# Altium PCB SerreVo_multiplexeur_PCB ASCII REV 1.00.PcbDoc
Units mm, origin at the board's own origin, x right, y up, seen from the top; angles counter-clockwise.
Board outline 69.85 x 45.09 mm, 2 copper layers (Top, Bottom), stack 1.54 mm thick; 28 components, 25 nets, 146 pads, 45 vias.
Unrouted connection lines stored in the file: 10.
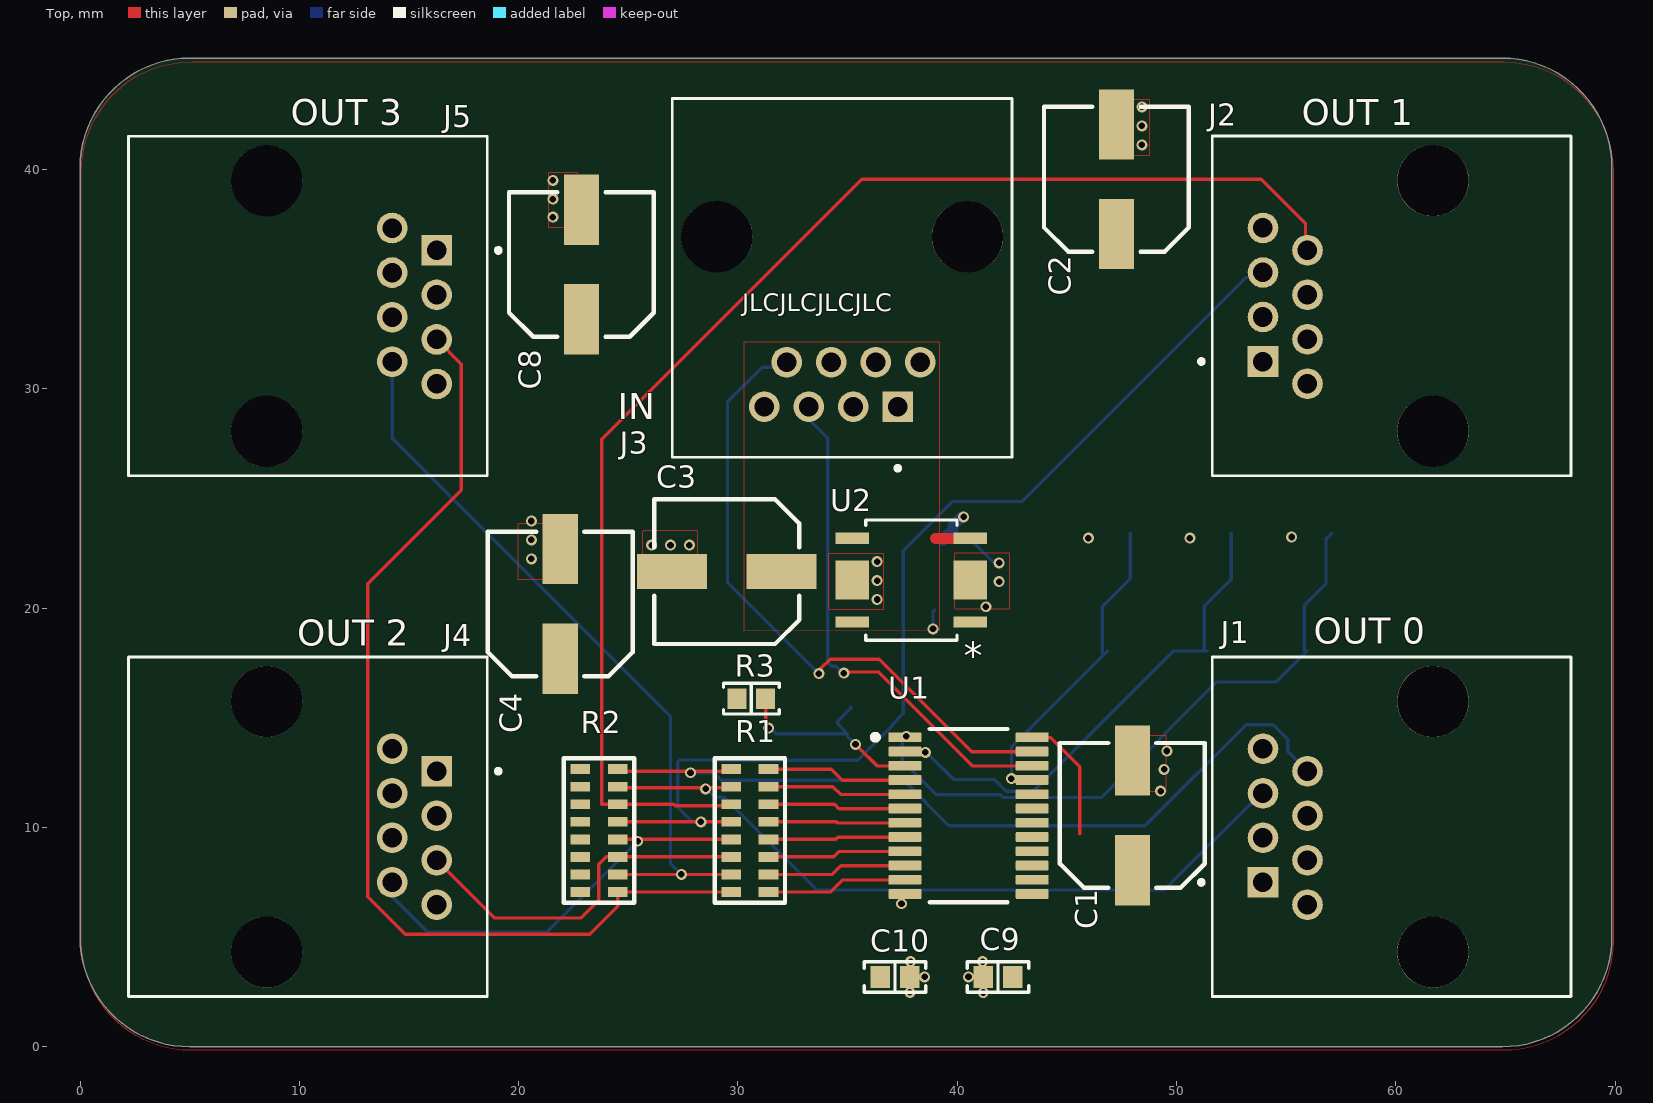
[diagram p0: Top view]
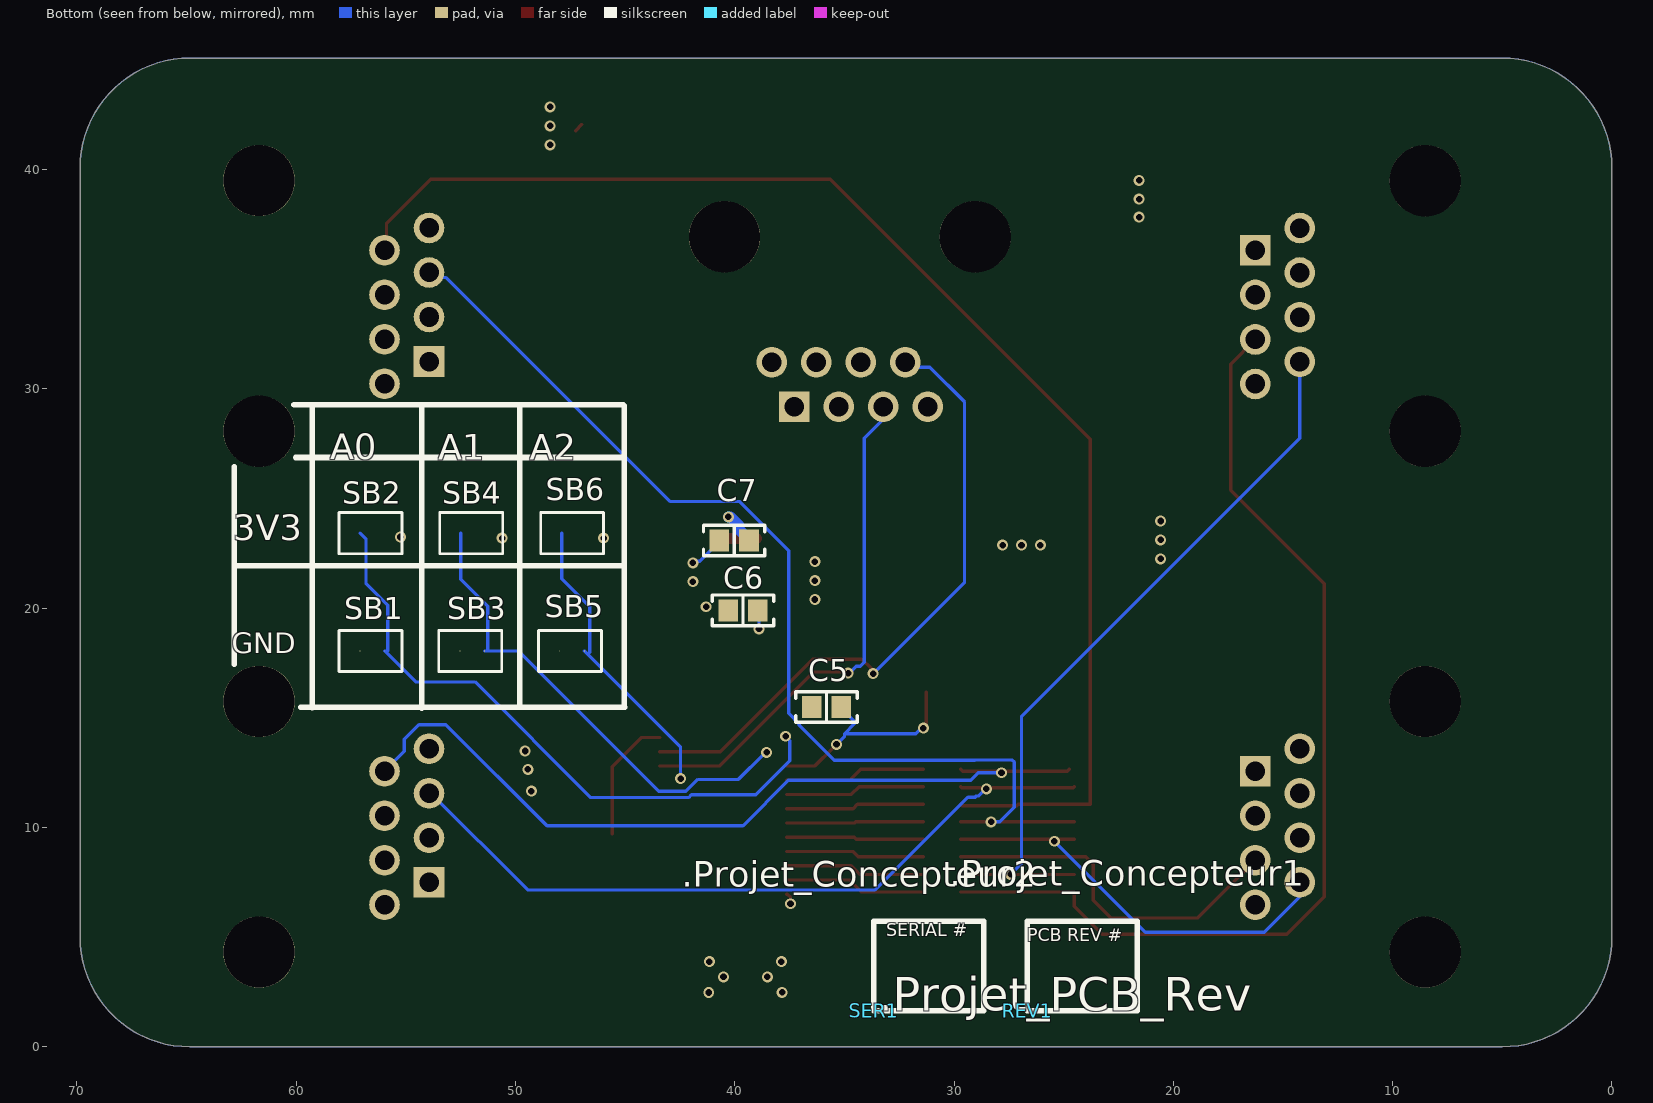
[diagram p1: Bottom view, seen from below]

## Layer stack, top to bottom
Top Solder: solder mask 0.0102, Solder Resist, Dk 3.5
Top: signal copper 0.035
Dielectric 1: core 1.47, FR-4, Dk 4.6
Bottom: signal copper 0.035
Bottom Solder: solder mask 0.0102, Solder Resist, Dk 3.5

## Board outline
0,5 0,40.085 cw(c5,40.085) 5,45.085 64.85,45.085 cw(c64.85,40.085) 69.85,40.085 69.85,5 cw(c64.85,5) 64.85,0 5,0 cw(c5,5)

## Design rules (kind name [scope] priority, off if disabled: settings)
AssemblyTestPointUsage [All] p0: scope1count=1 scope1_0_kind=Board scope1_0_value=Board scope2count=1 scope2_0_kind=Board scope2_0_value=Board commentlength=0
AssemblyTestpoint [All] p0: scope1count=1 scope1_0_kind=Board scope1_0_value=Board scope2count=1 scope2_0_kind=Board scope2_0_value=Board commentlength=0
BoardOutlineClearance [All] p0: scope1count=1 scope1_0_kind=Board scope1_0_value=Board scope2count=1 scope2_0_kind=Board scope2_0_value=Board commentlength=0 gap=0.2
BoardOutlineClearance [All] p1: gap=0.2 ignorepadtopadclearanceinfootprint=FALSE except(0: Arc-SplitContinuation Track-SplitContinuation SMDPad-SplitContinuation THPad-SplitContinuation Via-SplitContinuation Fill-SplitContinuation Poly-SplitContinuation Region-SplitContinuation Text-SplitContinuation)
Clearance [All] p0: scope1count=1 scope1_0_kind=Board scope1_0_value=Board scope2count=1 scope2_0_kind=Board scope2_0_value=Board commentlength=0 gap=0.152
Clearance [All] p1: gap=0.152 ignorepadtopadclearanceinfootprint=FALSE except(0: Arc-Hole Track-Hole SMDPad-Hole THPad-Hole Via-Hole Fill-Hole Poly-Hole Region-Hole Text-Hole; 0.127: Arc-Arc Arc-Track Track-Track SMDPad-Fill SMDPad-Poly SMDPad-Region; 0.2: Arc-SMDPad Track-SMDPad; 0.254: Arc-Via Track-Via Via-Via; 0.33: Arc-THPad Track-THPad; 0.5: THPad-THPad)
ComponentClearance [All] p0: scope1count=1 scope1_0_kind=Board scope1_0_value=Board scope2count=1 scope2_0_kind=Board scope2_0_value=Board commentlength=0 gap=0.102 collisioncheckmode=3
ComponentClearance "Schematic Component Clearance Constraint" [All] p0: scope1count=1 scope1_0_kind=Component scope1_0_value=REV1 scope2count=1 scope2_0_kind=Board scope2_0_value=Board commentlength=0 gap=0 collisioncheckmode=3
ComponentClearance "Schematic Component Clearance Constraint_1" [All] p0: scope1count=1 scope1_0_kind=Component scope1_0_value=SER1 scope2count=1 scope2_0_kind=Board scope2_0_value=Board commentlength=0 gap=0 collisioncheckmode=3
ComponentClearance "Schematic Component Clearance Constraint_1" [InComponent('SER1')] p1: gap=0 collisioncheckmode=3 verticalgap=0 showdistances=FALSE
ComponentClearance "Schematic Component Clearance Constraint" [InComponent('REV1')] p2: gap=0 collisioncheckmode=3 verticalgap=0 showdistances=FALSE
ComponentClearance [All] p3: gap=0.102 collisioncheckmode=3 verticalgap=0.102 showdistances=FALSE
DiffPairsRouting [All] p0: scope1count=1 scope1_0_kind=Board scope1_0_value=Board scope2count=1 scope2_0_kind=Board scope2_0_value=Board commentlength=0
FabricationTestPointUsage [All] p0: scope1count=1 scope1_0_kind=Board scope1_0_value=Board scope2count=1 scope2_0_kind=Board scope2_0_value=Board commentlength=0 valid=0 allowmultiple=FALSE
FabricationTestpoint [All] p0: scope1count=1 scope1_0_kind=Board scope1_0_value=Board scope2count=1 scope2_0_kind=Board scope2_0_value=Board commentlength=0 side=3 testpointundercomponent=TRUE minsize=1.016 maxsize=2.54 preferedsize=1.524 minholesize=0 maxholesize=1.016 preferedholesize=0.813 testpointgrid=0.025
FanoutControl Fanout_Default [All] p0: scope1count=1 scope1_0_kind=Board scope1_0_value=Board scope2count=1 scope2_0_kind=Board scope2_0_value=Board commentlength=30 // Fanout_Default (Default Rule)
FanoutControl Fanout_Small [All] p0 off: scope1count=1 scope1_0_kind=Board scope1_0_value=Board scope2count=1 scope2_0_kind=Board scope2_0_value=Board commentlength=84 // Protel DXP Scope 1 Expression Was: (CompPinCount < 5)   Fanout_Small (Default Rule)
FanoutControl Fanout_SOIC [All] p0 off: scope1count=1 scope1_0_kind=Board scope1_0_value=Board scope2count=1 scope2_0_kind=Board scope2_0_value=Board commentlength=71 // Protel DXP Scope 1 Expression Was: IsSOIC   Fanout_SOIC (Default Rule)
FanoutControl Fanout_LCC [All] p0 off: scope1count=1 scope1_0_kind=Board scope1_0_value=Board scope2count=1 scope2_0_kind=Board scope2_0_value=Board commentlength=69 // Protel DXP Scope 1 Expression Was: IsLCC   Fanout_LCC (Default Rule)
FanoutControl Fanout_BGA [All] p0 off: scope1count=1 scope1_0_kind=Board scope1_0_value=Board scope2count=1 scope2_0_kind=Board scope2_0_value=Board commentlength=69 // Protel DXP Scope 1 Expression Was: IsBGA   Fanout_BGA (Default Rule)
Height [All] p0: scope1count=1 scope1_0_kind=Board scope1_0_value=Board scope2count=1 scope2_0_kind=Board scope2_0_value=Board commentlength=0
HoleSize [All] p0: scope1count=1 scope1_0_kind=Board scope1_0_value=Board scope2count=1 scope2_0_kind=Board scope2_0_value=Board commentlength=0 absolutevalues=TRUE maxlimit=6.3 minlimit=0.3 maxpercent=80.000 minpercent=20.000
HoleSize [All] p1: absolutevalues=TRUE maxlimit=6.3 minlimit=0.3 maxpercent=80.000 minpercent=20.000
HoleToHoleClearance [All] p0: scope1count=1 scope1_0_kind=Board scope1_0_value=Board scope2count=1 scope2_0_kind=Board scope2_0_value=Board commentlength=0
HoleToHoleClearance [All] p1: gap=0.5 allowstackedmicrovias=FALSE
LayerPairs [All] p0: scope1count=1 scope1_0_kind=Board scope1_0_value=Board scope2count=1 scope2_0_kind=Board scope2_0_value=Board commentlength=0 enforce=TRUE
MinimumAnnularRing [All] p0: scope1count=1 scope1_0_kind=Board scope1_0_value=Board scope2count=1 scope2_0_kind=Board scope2_0_value=Board commentlength=0 minimumring=0.1
MinimumAnnularRing [All] p1: minimumring=0.1
MinimumSolderMaskSliver [All] p0: scope1count=1 scope1_0_kind=Board scope1_0_value=Board scope2count=1 scope2_0_kind=Board scope2_0_value=Board commentlength=0
MinimumSolderMaskSliver [All] p1: minsoldermaskwidth=0.1
NetAntennae [All] p0: scope1count=1 scope1_0_kind=Board scope1_0_value=Board scope2count=1 scope2_0_kind=Board scope2_0_value=Board commentlength=0
PasteMaskExpansion [All] p0: scope1count=1 scope1_0_kind=Board scope1_0_value=Board scope2count=1 scope2_0_kind=Board scope2_0_value=Board commentlength=0 expansion=0
PlaneClearance [All] p0: scope1count=1 scope1_0_kind=Board scope1_0_value=Board scope2count=1 scope2_0_kind=Board scope2_0_value=Board commentlength=0 clearance=0.152
PlaneClearance [All] p1: clearance=0.152
PlaneConnect [All] p0: scope1count=1 scope1_0_kind=Board scope1_0_value=Board scope2count=1 scope2_0_kind=Board scope2_0_value=Board commentlength=0 planeconnectstyle=Relief reliefexpansion=0.508 reliefentries=4 reliefconductorwidth=0.254 reliefairgap=0.254
PlaneConnect [All] p1: pad.planeconnectstyle=Relief pad.reliefexpansion=0.508 pad.reliefentries=4 pad.reliefconductorwidth=0.254 pad.reliefairgap=0.254 via.planeconnectstyle=Direct via.reliefexpansion=0.508 via.reliefentries=4 via.reliefconductorwidth=0.254 via.reliefairgap=0.254
PolygonConnect [All] p0: scope1count=1 scope1_0_kind=Board scope1_0_value=Board scope2count=1 scope2_0_kind=Board scope2_0_value=Board commentlength=0 connectstyle=Relief reliefconductorwidth=0.254 reliefentries=4 polygonreliefangle="90 Angle"
PolygonConnect [All] p1: thpad.connectstyle=Relief thpad.reliefconductorwidth=0.254 thpad.reliefentries=4 thpad.polygonreliefangle="90 Angle" thpad.airgapwidth=0.254 smdpad.connectstyle=Direct smdpad.reliefconductorwidth=0.254 smdpad.reliefentries=4 smdpad.polygonreliefangle="90 Angle" smdpad.airgapwidth=0.254 via.connectstyle=Direct via.reliefconductorwidth=0.254 via.reliefentries=4 via.polygonreliefangle="90 Angle" via.airgapwidth=0.254
RoutingCorners [All] p0: scope1count=1 scope1_0_kind=Board scope1_0_value=Board scope2count=1 scope2_0_kind=Board scope2_0_value=Board commentlength=0 cornerstyle=45-Degree minsetback=2.54 maxsetback=2.54
RoutingLayers [All] p0: scope1count=1 scope1_0_kind=Board scope1_0_value=Board scope2count=1 scope2_0_kind=Board scope2_0_value=Board commentlength=0 top layer=Automatic bottom layer=Automatic
RoutingPriority [All] p0: scope1count=1 scope1_0_kind=Board scope1_0_value=Board scope2count=1 scope2_0_kind=Board scope2_0_value=Board commentlength=0
RoutingTopology [All] p0: scope1count=1 scope1_0_kind=Board scope1_0_value=Board scope2count=1 scope2_0_kind=Board scope2_0_value=Board commentlength=0 topology=Shortest
RoutingVias [All] p0: scope1count=1 scope1_0_kind=Board scope1_0_value=Board scope2count=1 scope2_0_kind=Board scope2_0_value=Board commentlength=0 holewidth=0.3 width=0.5 viastyle="Through Hole" minholewidth=0.3 minwidth=0.5 maxholewidth=6.3 maxwidth=6.5
RoutingVias [All] p1: holewidth=0.3 width=0.5 viastyle="Through Hole" minholewidth=0.3 minwidth=0.5 maxholewidth=6.3 maxwidth=6.5
ShortCircuit [All] p0: scope1count=1 scope1_0_kind=Board scope1_0_value=Board scope2count=1 scope2_0_kind=Board scope2_0_value=Board commentlength=0 allowed=FALSE
SilkToBoardRegionClearance [All] p0: scope1count=1 scope1_0_kind=Board scope1_0_value=Board scope2count=1 scope2_0_kind=Board scope2_0_value=Board commentlength=0
SilkToSilkClearance [All] p0: scope1count=1 scope1_0_kind=Board scope1_0_value=Board scope2count=1 scope2_0_kind=Board scope2_0_value=Board commentlength=0
SilkToSilkClearance [All] p1: silktosilkclearance=0.102
SilkToSolderMaskClearance [All] p0 off: scope1count=1 scope1_0_kind=Board scope1_0_value=Board scope2count=1 scope2_0_kind=Board scope2_0_value=Board commentlength=44 // Protel DXP Scope 1 Expression Was: IsPad
SilkToSolderMaskClearance [IsPad] p1: minsilkscreentomaskgap=0.024 clearancetoexposedcopper=FALSE
SolderMaskExpansion [All] p0: scope1count=1 scope1_0_kind=Board scope1_0_value=Board scope2count=1 scope2_0_kind=Board scope2_0_value=Board commentlength=0 expansion=0.051
SolderMaskExpansion SolderMaskExpansion_Via [All] p0 off: scope1count=1 scope1_0_kind=Board scope1_0_value=Board scope2count=1 scope2_0_kind=Board scope2_0_value=Board commentlength=44 expansion=0.102 // Protel DXP Scope 1 Expression Was: isVia
SolderMaskExpansion SolderMaskExpansion_Via [isVia] p1: expansion=0.102 istentingtop=TRUE
SolderMaskExpansion [All] p2: expansion=0.051 istentingtop=FALSE
UnRoutedNet [All] p0: scope1count=1 scope1_0_kind=Board scope1_0_value=Board scope2count=1 scope2_0_kind=Board scope2_0_value=Board commentlength=0
UnpouredPolygon [All] p0: scope1count=1 scope1_0_kind=Board scope1_0_value=Board scope2count=1 scope2_0_kind=Board scope2_0_value=Board commentlength=0
Width [All] p0: scope1count=1 scope1_0_kind=Board scope1_0_value=Board scope2count=1 scope2_0_kind=Board scope2_0_value=Board commentlength=0 maxlimit=25.4 minlimit=0.127 preferedwidth=0.152
Width [All] p1: maxlimit=25.4 minlimit=0.127 preferedwidth=0.152 minimp=50.000000 maximp=50.000000 favimp=50.000000
22 further rules are at their usual default settings.

## Classes and differential pairs
component class TEMPLATE_Circuit: C1 C2 C3 C4 C5 C6 C7 C8 C9 C10 J1 J2 J3 J4 J5 R1 R2 R3 SB1 SB3 SB4 SB5 SB6 U1 U2
component class TEMPLATE_Title: REV1 SER1

## Components (designator, comment, footprint, x,y, rotation, side; value= is the part's Value field where it differs from the comment)
C1 "47 µF" "CAP ALSMD 6.6MM H6.1MM" 47.981,10.552 r90 top
C2 "47 µF" "CAP ALSMD 6.6MM H6.1MM" 47.256,39.561 r90 top
C3 "47 µF" "CAP ALSMD 6.6MM H6.1MM" 29.489,21.666 r180 top
C4 "47 µF" "CAP ALSMD 6.6MM H6.1MM" 21.895,20.193 r90 top
C5 "1 µF" "CAP 0603_1608" 35.814,15.494 r180 bottom
C6 "4.7 µF" "CAP 0603_1608" 39.619,19.902 r180 bottom
C7 "4.7 µF" "CAP 0603_1608" 40.025,23.089 r180 bottom
C8 "47 µF" "CAP ALSMD 6.6MM H6.1MM" 22.86,35.674 r90 top
C9 "22µF" "CAP 0603_1608" 41.859,3.185 r0 top
C10 "0.1 µF" "CAP 0603_1608" 37.159,3.185 r180 top
J1 "SS-60000-007" BEL_SS-60000-007 55.969,10.033 r90 top
J2 "SS-60000-007" BEL_SS-60000-007 55.969,33.785 r90 top
J3 "SS-60000-007" BEL_SS-60000-007 34.751,31.221 r180 top
J4 "SS-60000-007" BEL_SS-60000-007 14.229,10.033 r270 top
J5 "SS-60000-007" BEL_SS-60000-007 14.229,33.781 r270 top
R1 "742C163330JP" "RESNET 2506-16 CONCAVE" 30.546,9.86 r0 top
R2 "742C163331JP" "RESNET 2506-16 CONCAVE" 23.661,9.86 r0 top
R3 "10 kOhms" "RES 0603_1608" 30.607,15.875 r180 top
REV1 "Revision Cartridge Mini" REV_REVISION_CARTRIDGE_MINI 26.651,1.651 r180 bottom
SB1 "SBR_NO_0603" 0603_solderBridge_NO 56.523,18.05 r180 bottom
SB2 "SBR_NO_0603" 0603_solderBridge_NO 56.523,23.419 r180 bottom
SB3 "SBR_NO_0603" 0603_solderBridge_NO 51.97,18.05 r180 bottom
SB4 "SBR_NO_0603" 0603_solderBridge_NO 51.923,23.419 r180 bottom
SB5 "SBR_NO_0603" 0603_solderBridge_NO 47.418,18.05 r180 bottom
SB6 "SBR_NO_0603" 0603_solderBridge_NO 47.324,23.419 r180 bottom
SER1 "Serial Cartridge MICRO" SER_SERIAL_CARTRIDGE_MICRO 33.65,1.651 r180 bottom
U1 "TCA9548APWR" FP-PW0024A-MFG 40.513,10.541 r0 top
U2 "S-1172B33-E6T1U" HSOP-6_FH006-A-P-SD-2.1_ABL 37.901,21.277 r180 top

## Footprints (in the part's own frame and the unit in brackets; to place one, negate y for a bottom-side part, rotate by r counter-clockwise, add the part's x,y. Pads: shape width x height; smd on the part's side, far side on the other; paste and mask are expansions set on the pad)
0603_solderBridge_NO [mil]
  round 1 smd paste-0.5 mask+2: " "(-22.15,0) " "(22.15,0)
  silkscreen extent -60,-37 53,37
BEL_SS-60000-007 [mm]
  rect 1.398x1.398 hole 0.89: 1(-2.535,2.03)
  round 1.398 hole 0.89: 2(-3.555,0) 3(-1.525,0) 4(0.505,0) 5(-0.505,2.03) 6(1.525,2.03) 7(3.555,2.03) 8(2.535,0)
  round 3.25 hole 3.25 unplated: ""(-5.715,-5.72) ""(5.715,-5.72)
  silkscreen extent -7.75,-12.02 7.75,4.94
"CAP 0603_1608" [mm] "Chip Capacitor, 2-Leads, Body 1.60x0.80mm, IPC Medium Density"
  rect 0.9x1 smd: 1(-0.675,0) 2(0.675,0)
  silkscreen extent -1.4,-0.7 1.4,0.7
"CAP ALSMD 6.6MM H6.1MM" [mm] "Aluminum Electrolytic Capacitor, Body 6.60x6.60x6.10mm, IPC Low Density"
  rect 3.2x1.6 smd: 1(-2.5,0) 2(2.5,0)
  silkscreen extent -3.3,-3.3 3.3,3.3
FP-PW0024A-MFG [mm]
  rrect22% 1.5x0.45 smd paste+0 mask+0: 1(-2.9,3.575) 2(-2.9,2.925) 3(-2.9,2.275) 4(-2.9,1.625) 5(-2.9,0.975) 6(-2.9,0.325) 7(-2.9,-0.325) 8(-2.9,-0.975) 9(-2.9,-1.625) 10(-2.9,-2.275) 11(-2.9,-2.925) 12(-2.9,-3.575) 13(2.9,-3.575) 14(2.9,-2.925) 15(2.9,-2.275) 16(2.9,-1.625) 17(2.9,-0.975) 18(2.9,-0.325) 19(2.9,0.325) 20(2.9,0.975) 21(2.9,1.625) 22(2.9,2.275) 23(2.9,2.925) 24(2.9,3.575)
  silkscreen extent -4.37,-3.95 1.77,3.95
HSOP-6_FH006-A-P-SD-2.1_ABL [mil]
  rect 60x20 smd paste+0 mask+0: 1(-106,75.2) 3(-106,-75.2) 4(106,-75.2) 6(106,75.2)
  rect 60x70 smd paste+0 mask+0: 2(-106,0) 5(106,0)
  silkscreen extent -82,-108 82,108
"RES 0603_1608" [mm] "Chip Resistor, 2-Leads, Body 1.60x0.80mm, IPC Medium Density"
  rect 0.85x0.95 smd: 1(-0.65,0) 2(0.65,0)
  silkscreen extent -1.27,-0.7 1.27,0.7
"RESNET 2506-16 CONCAVE" [mm] "8 resistor 6.40x1.60mm, 0.7mm high"
  rect 0.9x0.45 smd: 1(-0.85,2.8) 2(-0.85,2) 3(-0.85,1.2) 4(-0.85,0.4) 5(-0.85,-0.4) 6(-0.85,-1.2) 7(-0.85,-2) 8(-0.85,-2.8) 9(0.85,-2.8) 10(0.85,-2) 11(0.85,-1.2) 12(0.85,-0.4) 13(0.85,0.4) 14(0.85,1.2) 15(0.85,2) 16(0.85,2.8)
  silkscreen extent -1.6,-3.3 1.6,3.3
REV_REVISION_CARTRIDGE_MINI [mm]
  silkscreen extent 0,0 5,4.08
SER_SERIAL_CARTRIDGE_MICRO [mm]
  silkscreen extent 0,0 5,4.08

## Part data
C1 C2 C3 C4 C8: library part 476SML035M, "CAP ALUM 47UF 20% 35V SMD"
C5: library part C0603X105M4RACAUTO, "CAP CER 1UF 16V X7R 0603"
C6 C7: library part CL10A475KA8NQNC, "CAP CER 4.7UF 25V X5R 0603"
C9: library part 06036D226MAT2A, "CAP CER 22UF 6.3V X5R 0603"
C10: library part C0603C104M4RAC7411, "CAP CER 0.1UF 16V X7R 0603"
J1 J2 J3 J4 J5: "Jack Modular Connector 8p8c _RJ45, Ethernet_ Vertical Unshielded Cat6"
R1: "RES ARRAY 8 RES 33 OHM 2506"
R2: "RES ARRAY 8 RES 330 OHM 2506"
R3: library part RCS060310K0JNEA, "RES SMD 10K OHM 5% 1/4W 0603"
REV1: library part REV_REVISION_CARTRIDGE_MINI, "REV - REVISION CARTRIDGE MINI"
SB1 SB2 SB3 SB4 SB5 SB6: library part CMP-005-000007-1, "Solder Bridge 0603 NO"
SER1: library part SER_SERIAL_CARTRIDGE_MICRO, "SER - SERIAL CARTRIDGE MICRO"
U1: library part CMP-04892-000002-1, "IC I2C SW 8CH W/RESET 24TSSOP"
U2: "No Description Available"

## Via types
v1: diameter 0.5, hole 0.3, Top to Bottom, tented both sides, 45 vias

## Nets (pads, with @x,y where several pads share a name; then routed paths per layer and width w, separated by ;. In a path a pad name is that pad's centre, name@x,y a point inside that pad or via, vN(x,y) a via of type N, cw(c..) or ccw(c..) an arc to the next point about the centre after c; other vN are vias at no path point)
3V3: "SB2. "@55.96,23.419 "SB4. "@51.361,23.419 "SB6. "@46.761,23.419 C1.1 C2.1 C4.1 C7.2 C8.1 C9.2 C10.2 J1.3 J1.4 J2.3 J2.4 J4.3 J4.4 J5.3 J5.4 R2.1 R2.2 R2.3 R2.4 R2.5 R2.6 R2.7 R2.8 R3.2 U1.24 U2.1 | length 7.3
  Top w0.152: U1.24@43.425,14.108 44.233,14.108 45.577,12.764 45.577,9.716
  Bottom w0.5: C7.2 39.35,23.139 39.8,23.589 39.8,23.775 40.187,24.162 v1(40.289,24.162)
  other v1: 45.979,23.197 50.602,23.197 55.25,23.248
5V: C3.1 C6.2 J3.1 J3.2 U2.3 U2.6 | length 2.5
  Top w0.5: 39.002,23.187 U2.3
  Bottom w0.152: v1(38.891,19.055) 38.891,19.849 C6.2
A0: "SB1. "@55.96,18.05 "SB2. "@57.085,23.419 U1.1 | length 28.8
  Bottom w0.152: 37.49,13.969 37.49,13.041 39.031,11.501 41.974,11.501 42.106,11.368 46.572,11.368 51.841,16.637 54.548,16.637 55.96,18.05 55.829,18.05 ; 55.829,18.11 55.829,20.136 56.812,21.119 56.812,23.145 57.085,23.419
  other v1: 37.676,14.161
A1: "SB3. "@51.408,18.05 "SB4. "@52.486,23.419 U1.2 | length 22
  Bottom w0.152: v1@38.684,13.335 39.827,12.192 41.677,12.192 42.222,11.647 43.469,11.647 49.871,18.05 51.257,18.05 ; 51.408,18.05 51.257,18.05 ; 52.486,23.419 52.486,21.328 51.257,20.099 51.257,18.05
  other v1: 38.54,13.424
A2: "SB5. "@46.856,18.05 "SB6. "@47.886,23.419 U1.21 | length 13.6
  Bottom w0.152: v1(42.462,12.227) 42.469,12.234 42.469,13.663 46.856,18.05 ; 46.609,17.983 46.609,20.062 47.886,21.34 47.886,23.419
GND: "SB1. "@57.085,18.05 "SB3. "@52.533,18.05 "SB5. "@47.981,18.05 C1.2 C2.2 C3.2 C4.2 C5.1 C6.1 C7.1 C8.2 C9.1 C10.1 J1.5 J1.7 J2.5 J2.7 J3.5 J3.7 J4.5 J4.7 J5.5 J5.7 U1.12 U2.2 U2.5 | length 2.7
  Top w0.152: v1(37.455,6.524) 37.455,6.809 37.604,6.958 U1.12@37.625,6.958 ; v1@41.859,22.022 v1(41.909,22.072) ; C2.2@46.971,42.061 C2.2@47.256,41.776
  Bottom w0.152: C7.1 40.7,23.039 41.6,22.138 41.843,22.138 v1(41.909,22.072)
  other v1: 37.839,2.485 41.184,2.478 38.509,3.185 40.509,3.185 37.875,3.885 41.157,3.885 49.276,11.659 49.428,12.649 49.555,13.487 41.3,20.066 36.348,20.396 41.909,21.209 36.348,21.26 36.348,22.123 20.574,22.251 26.058,22.88 26.921,22.88 27.784,22.88 20.574,23.114 20.574,23.978 21.56,37.836 21.56,38.654 21.56,39.51 48.414,41.132 48.414,41.996 48.414,42.859
NetC5_2: C5.2 R3.1 U1.3 | length 10.1
  Top w0.152: R3.1@31.267,16.176 31.267,14.75 31.394,14.623 v1(31.394,14.529) ; v1@35.504,13.642 36.339,12.808 U1.3@37.625,12.808
  Bottom w0.152: v1(31.394,14.529) 31.488,14.529 31.738,14.279 34.993,14.279 ; C5.2 35.139,15.444 34.55,14.855 34.55,14.722 34.993,14.279 ; v1(35.357,13.792) 34.993,14.156 34.993,14.279
NetR1_9: R1.9 U1.11 | length 6.5
  Top w0.152: R1.9 34.223,7.06 34.77,7.608 U1.11@37.625,7.608
NetR1_10: R1.10 U1.10 | length 6.4
  Top w0.152: R1.10 34.299,7.86 34.697,8.258 U1.10@37.625,8.258
NetR1_11: R1.11 U1.9 | length 6.3
  Top w0.152: R1.11 34.376,8.66 34.623,8.908 U1.9@37.625,8.908
NetR1_12: R1.12 U1.8 | length 6.3
  Top w0.152: R1.12 34.452,9.46 34.549,9.558 U1.8@37.625,9.558
NetR1_13: R1.13 U1.7 | length 6.3
  Top w0.152: R1.13 34.477,10.26 34.53,10.208 U1.7@37.625,10.208
NetR1_14: R1.14 U1.6 | length 6.3
  Top w0.152: R1.14 34.401,11.06 34.604,10.858 U1.6@37.625,10.858
NetR1_15: R1.15 U1.5 | length 6.4
  Top w0.152: R1.15 34.325,11.86 34.678,11.508 U1.5@37.625,11.508
NetR1_16: R1.16 U1.4 | length 6.4
  Top w0.152: R1.16 34.249,12.66 34.751,12.158 U1.4@37.625,12.158
SCL_0: J1.6 R1.2 R2.15 | length 34.3
  Top w0.152: R2.15 24.561,11.81 28.474,11.81 v1(28.524,11.76) 28.574,11.81 29.646,11.81 R1.2
  Bottom w0.152: v1(28.524,11.76) 28.555,11.76 28.878,11.437 28.986,11.437 29.037,11.386 29.363,11.386 33.599,7.151 49.443,7.151 J1.6@53.85,11.558
SCL_1: J2.6 R1.4 R2.13 | length 48.9
  Top w0.152: R2.13 v1(28.305,10.26) R1.4
  Bottom w0.152: v1(28.305,10.26) 27.916,10.26 27.254,10.922 27.254,12.988 27.343,13.077 29.037,13.077 29.046,13.068 35.453,13.068 37.053,14.668 37.053,14.718 37.541,15.206 37.541,22.62 39.787,24.867 40.406,24.867 ; 40.434,24.867 42.951,24.867 53.163,35.079 53.708,35.079 J2.6
SCL_2: J4.6 R1.6 R2.11 | length 16.6
  Top w0.152: J4.6 18.891,5.876 22.844,5.876 23.657,6.689 23.657,8.319 23.998,8.66 R2.11 R1.6
SCL_3: J5.6 R1.8 R2.9 | length 46.1
  Top w0.152: J5.6 17.383,31.132 17.383,25.388 13.116,21.121 13.116,6.846 14.822,5.14 23.246,5.14 24.52,6.414 R2.9@24.52,7.06 ; R2.9 R2.9@24.52,7.06 ; R1.8 R2.9@24.52,7.06
SCL_IN: J3.6 U1.22 | length 23.3
  Top w0.152: v1(34.823,17.043) 34.873,17.093 36.399,17.093 40.684,12.808 U1.22@43.425,12.808
  Bottom w0.152: J3.6@32.892,28.953 34.089,27.756 34.089,17.53 34.269,17.351 34.454,17.351 34.761,17.043 v1(34.823,17.043)
SDA_0: J1.8 R1.1 R2.16 | length 37.4
  Top w0.152: R2.16@24.747,12.649 24.833,12.563 27.799,12.563 v1@27.834,12.598 ; v1(27.834,12.497) v1@27.834,12.598 ; R1.1 29.599,12.563 27.869,12.563 v1@27.834,12.598
  Bottom w0.152: v1(27.834,12.497) 28.888,12.497 29.236,12.148 37.557,12.148 39.621,10.084 48.56,10.084 53.169,14.693 54.397,14.693 55.064,14.026 55.064,13.473 J1.8
SDA_1: J2.8 R1.3 R2.14 | length 61.7
  Top w0.152: R1.3 29.623,10.987 27.14,10.987 27.067,11.06 23.784,11.06 23.784,27.699 35.646,39.561 53.857,39.561 55.88,37.538 J2.8@55.88,36.316
SDA_2: J4.8 R1.5 R2.12 | length 19.5
  Top w0.152: R2.12 v1@25.335,9.46 ; v1(25.422,9.373) v1@25.335,9.46 ; R1.5 v1@25.335,9.46
  Bottom w0.152: J4.8 14.229,6.85 15.859,5.22 21.269,5.22 v1(25.422,9.373)
SDA_3: J5.8 R1.7 R2.10 | length 34
  Top w0.152: R2.10 27.086,7.86 v1@27.415,7.86 ; v1(27.416,7.862) v1@27.415,7.86 ; R1.7 v1@27.415,7.86
  Bottom w0.152: J5.8 14.229,27.75 26.924,15.055 26.924,8.354 v1(27.416,7.862)
SDA_IN: J3.8 U1.23 | length 29
  Top w0.152: v1(33.687,17.013) 33.754,17.08 33.754,17.23 34.197,17.673 36.441,17.673 40.656,13.458 U1.23@43.425,13.458
  Bottom w0.152: J3.8@31.882,30.983 31.099,30.983 29.52,29.404 29.52,21.181 v1(33.687,17.013)
pads on no net: J1. J1.1 J1.2 J2. J2.1 J2.2 J3. J3.3 J3.4 J4. J4.1 J4.2 J5. J5.1 J5.2 U1.13 U1.14 U1.15 U1.16 U1.17 U1.18 U1.19 U1.20 U2.4

## Polygon pours and split planes (outlines as drawn)
5V on Top "5V_L01_P018" (solid, remove dead copper, pour order 18): 39.211,18.991 39.211,32.129 30.26,32.129 30.26,18.971
GND on Top "GND_L01_P024" (solid, pour order 24): 28.156,20.934 28.156,23.523 25.687,23.523 25.626,23.462 25.626,20.934
GND on Top "GND_L01_P023" (solid, pour order 23): 19.945,21.315 21.463,21.315 21.463,23.846 19.945,23.846
GND on Top "GND_L01_P022" (solid, pour order 22): 21.371,39.877 22.66,39.877 22.66,37.408 22.598,37.346 21.371,37.346
GND on Top "GND_L01_P020" (solid, pour order 20): 48.768,43.188 46.941,43.188 46.941,40.719 47.002,40.657 48.768,40.657
GND on Top "GND_L01_P015" (solid, pour order 15): 49.53,14.174 48.241,14.174 48.241,11.705 48.302,11.644 49.53,11.644
GND on Top "GND_L01_P013" (solid, pour order 13): 48.768,43.188 46.941,43.188 46.941,40.719 47.002,40.657 48.768,40.657
3V3 on Top "3V3_L01_P019" (solid, remove dead copper, pour order 19): 0.061,4.832 0.061,39.917 cw(c5.061,39.917) 5.061,44.917 64.911,44.917 cw(c64.911,39.917) 69.911,39.917 69.911,4.832 cw(c64.911,4.832) 64.911,-0.168 5.061,-0.168 cw(c5.061,4.832)
GND on Top "GND_L01_P017" (solid, pour order 17): 36.657,22.474 34.116,22.474 34.116,20.005 34.177,19.943 36.657,19.943
GND on Top "GND_L01_P016" (solid, pour order 16): 42.397,22.512 39.856,22.512 39.856,20.043 39.918,19.982 42.397,19.982
GND on Bottom "GND_L02_P014" (solid, remove dead copper, pour order 14): 0,5 0,40.085 cw(c5,40.085) 5,45.085 64.85,45.085 cw(c64.85,40.085) 69.85,40.085 69.85,5 cw(c64.85,5) 64.85,0 5,0 cw(c5,5)

## Silkscreen, mask and mechanical layers (free items; w line width, h text height)
Top Overlay:
  text "OUT 3" at 9.605,42.03 h1.2
  text "OUT 1" at 55.703,42.03 h1.2
  text "JLCJLCJLCJLC" at 30.196,33.553 h0.8
  text "IN" at 24.511,28.626 h1.2
  text "OUT 0" at 56.261,18.39 h1.2
  text "OUT 2" at 9.896,18.282 h1.2
Bottom Overlay:
  lines w0.254: 45.009,15.477 59.792,15.477 ; 45.034,15.545 45.034,29.235 ; 45.034,26.873 60.02,26.873 ; 45.075,29.269 60.096,29.269 ; 45.11,21.946 62.789,21.946 ; 49.809,15.621 49.809,29.108 ; 54.28,15.443 54.28,29.159 ; 59.258,15.469 59.258,29.159 ; 62.814,17.45 62.814,26.441
  text "A0" at 58.445,26.416 h2
  text "A2" at 49.352,26.391 h2
  text "A1" at 53.518,26.391 h2
  text "3V3" at 62.865,22.708 h2
  text "GND" at 62.941,17.628 h1.6
  text ".Projet_Concepteur1" at 30.201,6.96 h2
  text ".Projet_Concepteur2" at 42.418,6.909 h2
Bottom Solder:
  text ".Projet_Titre" at 47.362,40.713 h3.5
  text "0" at 24.326,17.836 h1.8
  text ".Projet_Date" at 20.468,1.651 h0.91
Board Outline:
  the board outline again, w0.254

## Text inside footprints (layer, text, board x,y; h text height)
REV1: Bottom Overlay "PCB REV #" at 26.651,4.601 h1
SER1: Bottom Overlay "SERIAL #" at 33.087,4.843 h1
U2: Top Overlay "*" at 41.165,18.986 h1.27 r180; Top 3D Models "*" at 39.92,20.383 h1.27 r180